# Altium PCB CH32F&Vx0xV-R1-1v1.PcbDoc (part 2 of 2)
Units mm, origin at the board's own origin, x right, y up, seen from the top; angles counter-clockwise.
Board outline 74 x 103.43 mm, 2 copper layers (Top Layer, Bottom Layer); 78 components, 138 nets, 482 pads, 658 vias.
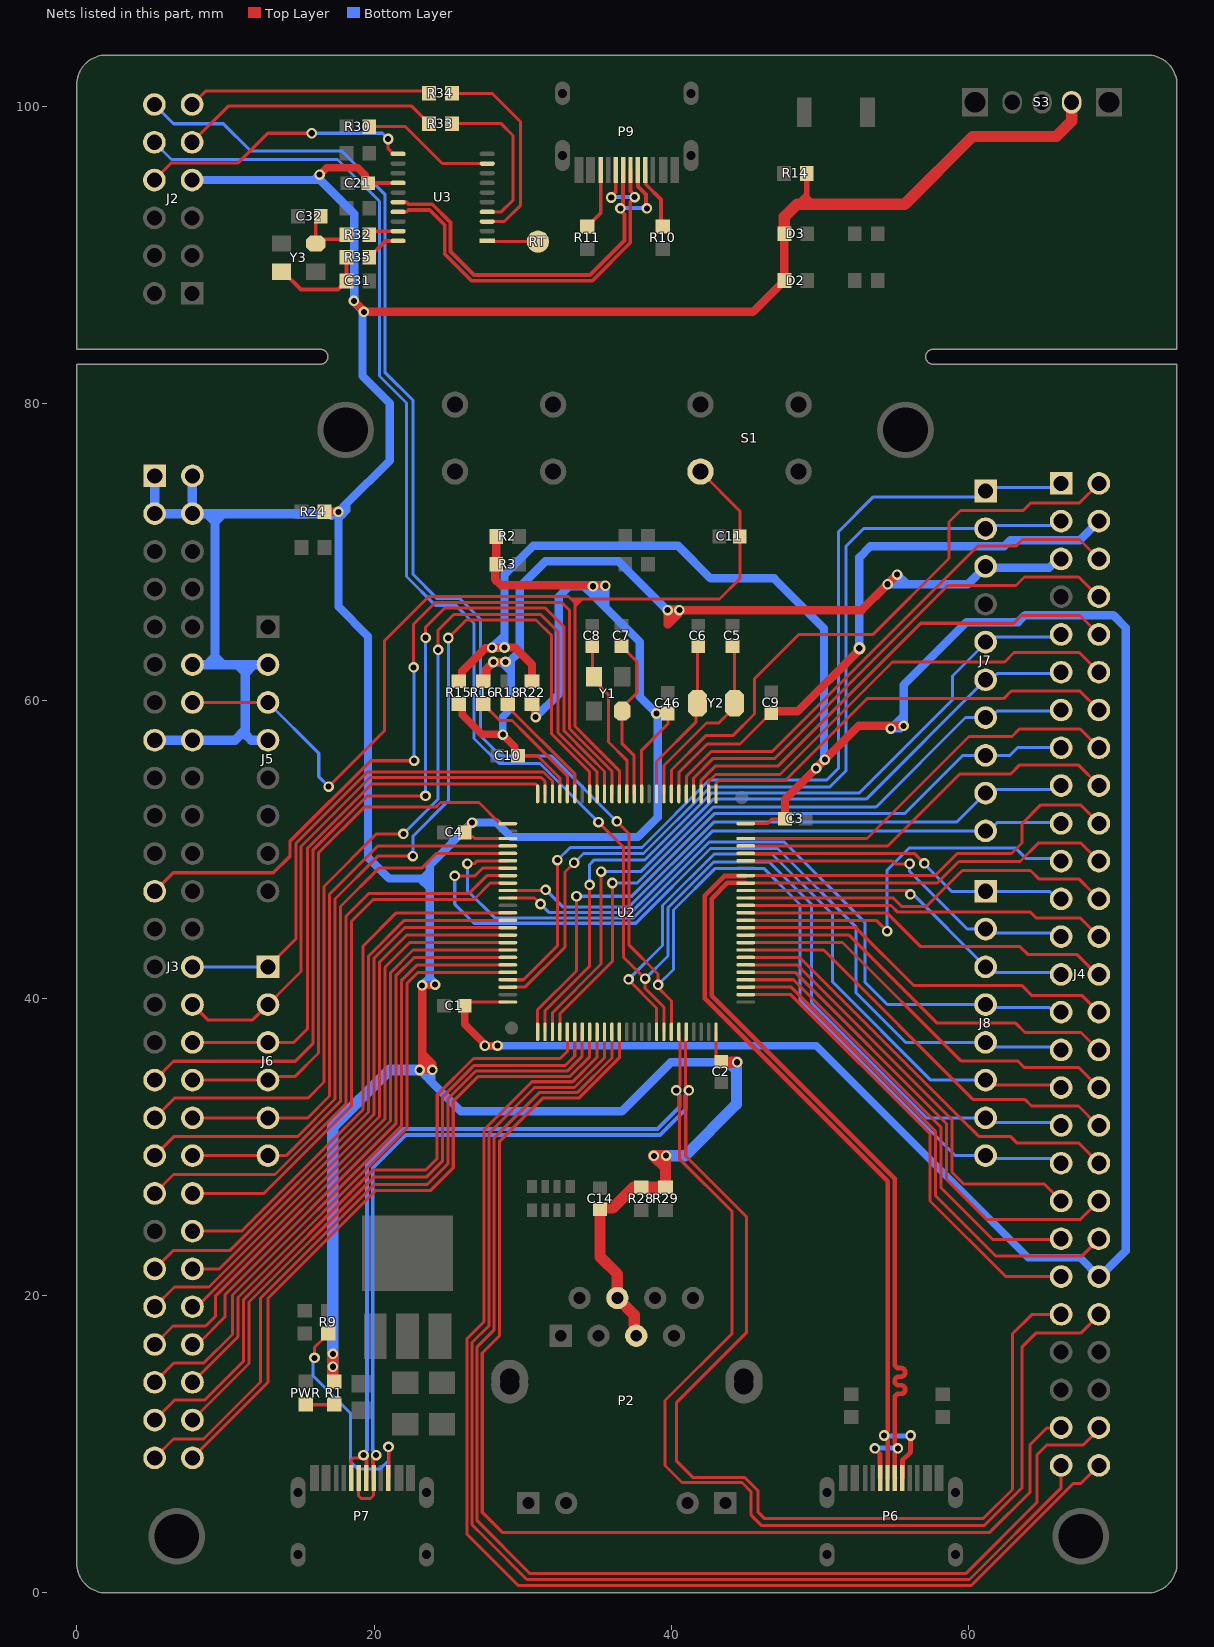
[diagram p2: the nets of this part, all layers, seen from the top]

## Via types
v1: diameter 0.61, hole 0.305, Top Layer to Bottom Layer, tented both sides, 509 vias
v2: diameter 0.711, hole 0.406, Top Layer to Bottom Layer, tented both sides, 148 vias
v3: diameter 0.813, hole 0.457, Top Layer to Bottom Layer, tented both sides, 1 vias

## Nets (pads, with @x,y where several pads share a name; then routed paths per layer and width w, separated by ;. In a path a pad name is that pad's centre, name@x,y a point inside that pad or via, vN(x,y) a via of type N, cw(c..) or ccw(c..) an arc to the next point about the centre after c; other vN are vias at no path point) (continued)
NetP7_B5: P7.B5 R9.2 | length 16.1
  Top Layer w0.203: v2(15.997,15.81) 15.997,16.519 16.53,17.052 16.53,17.077 16.893,17.44 R9.2@16.918,17.44 ; P7.B5@20.967,7.722 20.992,7.747 20.992,9.81 v2(20.975,9.827)
  Bottom Layer w0.203: v2(15.997,15.81) 15.911,15.723 15.911,14.586 18.42,12.077 18.42,8.831 18.904,8.346 20.427,8.346 20.975,8.894 v2(20.975,9.827)
NetP9_A5: P9.A5 R10.1 | length 4.2
  Top Layer w0.254: P9.A5@38.25,95.706 38.273,95.683 38.273,94.74 39.308,93.705 R10.1@39.308,91.902
NetP9_B5: P9.B5 R11.1 | length 4.2
  Top Layer w0.254: R11.1@34.337,91.902 35.25,92.814 P9.B5@35.25,95.706
NetPWR_1: PWR.1 R1.1 | length 1.6
  Top Layer w0.254: PWR.1@15.688,12.659 17.308,12.659 R1.1@17.325,12.675
NRST: C11.2 J3.14 J5.3 S1.1 U2.14 | length 74.1
  Top Layer w0.203: J3.14@7.79,59.888 J5.3@12.87,59.888 ; v2(16.951,54.231) 20.692,57.972 20.692,64.016 23.687,67.01 33.083,67.01 33.249,66.844 ; U2.14@36.5,53.74 36.5,55.291 34.75,57.042 33.51,58.281 33.51,66.343 ; S1.1@41.955,75.418 44.602,72.771 C11.2@44.602,71.051 ; C11.2@44.259,70.708 C11.2@44.602,71.051 ; 33.249,66.844 33.51,66.844 ; 33.249,66.844 33.51,66.583 ; 33.51,66.343 34.012,66.844 ; 33.51,66.343 33.51,66.583 ; 33.51,66.583 33.51,66.844 ; 33.51,66.583 33.771,66.844 ; 33.51,66.844 33.771,66.844 ; 33.771,66.844 34.012,66.844 ; 34.012,66.844 43.241,66.844 44.602,68.206 C11.2@44.602,71.051
  Bottom Layer w0.203: J5.3@12.87,59.888 16.282,56.476 16.282,54.9 v2(16.951,54.231)
OSC_IN: C32.2 R32.2 Y3.1 | length 4.3
  Top Layer w0.254: C32.2@16.417,92.58 16.083,92.247 Y3.1@16.083,90.753 16.384,90.753 16.675,91.044 17.858,91.044 R32.2@18.143,91.329
OSC_OUT: C31.2 R35.2 Y3.3 | length 6.7
  Top Layer w0.254: Y3.3@13.783,88.853 13.883,88.853 15.08,87.656 17.568,87.656 17.78,87.869 17.805,87.869 18.143,88.207 C31.2@18.143,88.232 R35.2@18.143,89.821
PA0: J3.28 J6.1 U2.23 | length 34.5
  Top Layer w0.203: J6.1@12.87,42.108 14.752,43.99 14.752,50.414 19.548,55.21 31.391,55.21 32,54.6 U2.23@32,53.74
  Bottom Layer w0.203: J3.28@7.79,42.108 J6.1@12.87,42.108
PA1: J3.30 J6.2 U2.24 | length 36.8
  Top Layer w0.203: J3.30@7.79,39.568 8.817,38.541 11.843,38.541 15.095,41.793 15.095,50.208 19.729,54.841 31.238,54.841 31.5,54.58 U2.24@31.5,53.74
PA2: J3.32 J6.3 U2.25 | length 38.1
  Top Layer w0.203: J3.32@7.79,37.028 J6.3@12.87,37.028 14.622,37.028 15.517,37.923 15.517,50.066 19.869,54.418 30.86,54.418 30.987,54.29 30.987,54.28 31,54.267 U2.25@31,53.74
PA3: J3.34 J6.4 U2.26 | length 37.7
  Top Layer w0.203: J3.34@7.79,34.488 J6.4@12.87,34.488 13.1,34.718 14.672,34.718 16.269,36.315 16.269,49.773 19.339,52.843 24.156,52.843 24.472,53.159 27.06,53.159 28.479,51.74 U2.26@29.255,51.74
PA4: J3.36 J6.5 U2.29 | length 37
  Top Layer w0.203: J3.36@7.79,31.948 J6.5@12.87,31.948 15.537,31.948 17.006,33.418 17.006,46.986 20.26,50.24 24.177,50.24 U2.29@29.255,50.24
PA5: J3.38 J6.6 U2.30 | length 37.6
  Top Layer w0.203: J3.38@7.79,29.408 J6.6@12.87,29.408 14.089,29.408 17.742,33.062 17.742,46.168 20.318,48.743 23.206,48.743 24.202,49.74 U2.30@29.255,49.74
PA6: J4.29 J8.4 U2.31 | length 54.5
  Top Layer w0.203: v2(26.273,49.047) 26.741,49.047 26.934,49.24 U2.31@29,49.24
  Bottom Layer w0.203: v2(26.273,49.047) 26.273,47.245 28.111,45.407 37.45,45.407 42.533,50.49 47.611,50.49 53.03,45.071 53.03,41.057 54.519,39.568 J8.4@61.13,39.568 61.331,39.368 65.431,39.368 65.485,39.313 65.957,39.313 J4.29@66.21,39.06
PA7: J4.31 J8.5 U2.32 | length 57.3
  Top Layer w0.203: v2(25.43,48.231) 26.787,48.231 27.296,48.74 U2.32@29,48.74
  Bottom Layer w0.203: v2(25.43,48.231) 25.43,46.326 26.717,45.039 37.603,45.039 42.627,50.064 47.142,50.064 52.427,44.779 52.427,40.348 55.747,37.028 61.487,37.028 61.802,36.714 66.016,36.714 J4.31@66.21,36.52
PA8: J4.33 J8.6 U2.67 | length 47.6
  Top Layer w0.203: v2(37.122,41.267) 37.122,41.215 39,39.337 U2.67@39,37.74 ; J8.6@61.13,34.488 61.487,34.488 61.813,34.163 66.027,34.163 J4.33@66.21,33.98
  Bottom Layer w0.203: v2(37.122,41.267) 37.122,41.27 39.4,43.547 39.4,46.228 42.873,49.701 46.769,49.701 50.828,45.643 50.828,41.104 57.444,34.488 J8.6@61.13,34.488
PA9: J2.10 J4.35 J8.7 U2.68 | length 127.3
  Top Layer w0.203: v2(35.097,51.837) 36.771,50.163 36.771,42.765 38.225,41.31 v2(38.235,41.31) 38.235,40.653 39.5,39.389 U2.68@39.5,37.74
  Bottom Layer w0.203: J2.10@5.225,97.561 6.381,96.405 17.55,96.405 20.365,93.59 20.365,81.843 22.181,80.027 22.181,68.355 24.119,66.417 25.504,66.417 26.725,65.196 26.725,57.47 28.417,55.778 31.156,55.778 v2(35.097,51.837) ; v2(38.235,41.31) 39.768,42.843 39.768,46.075 42.861,49.169 46.567,49.169 49.415,46.321 49.415,39.699 57.165,31.948 J8.7@61.13,31.948 61.487,31.948 61.81,31.626 66.024,31.626 J4.35@66.21,31.44
PA10: J2.12 J4.37 J8.8 U2.69 | length 129.8
  Top Layer w0.203: v2(36.33,51.889) 37.139,51.08 37.139,43.586 39.104,41.621 v2(39.104,40.897) ; v2@39.01,40.803 40,39.813 U2.69@40,37.74
  Bottom Layer w0.203: J2.12@5.225,100.101 6.518,98.808 9.869,98.808 11.691,96.986 17.812,96.986 20.731,94.067 20.731,82.089 22.631,80.188 22.631,68.491 24.252,66.87 25.776,66.87 27.158,65.487 27.158,57.658 28.543,56.273 31.945,56.273 v2(36.33,51.889) ; v2(39.104,40.897) 40.136,41.929 40.136,45.923 42.945,48.732 46.215,48.732 48.65,46.297 48.65,39.864 59.106,29.408 J8.8@61.13,29.408 61.487,29.408 61.687,29.209 65.544,29.209 65.853,28.9 J4.37@66.21,28.9
PA11: J4.46 P7.A7 P7.B7 U2.70 | length 123.4
  Top Layer w0.203: P7.B7@18.467,7.722 18.467,8.941 18.601,9.075 19.281,9.075 v2@19.31,9.104 ; v2@19.381,9.175 v2@19.31,9.104 ; v2@19.51,9.079 19.489,9.079 19.471,9.079 19.446,9.104 v2@19.31,9.104 ; v2(40.325,33.794) 40.325,33.895 40.566,34.136 40.566,37.153 40.5,37.219 U2.70@40.5,37.74 ; v2@40.417,33.711 40.417,33.571 40.535,33.453 40.535,29.202 44.091,25.646 44.091,17.453 39.573,12.936 39.573,8.567 40.715,7.426 44.741,7.426 45.345,6.822 45.345,5.263 46.08,4.529 47.638,4.529 61.027,4.529 63.563,7.065 63.563,16.53 64.501,17.468 67.521,17.468 68.75,18.697 J4.46@68.75,18.74
  Top Layer w0.254: v2(19.292,9.265) 19.304,9.265 19.489,9.079 v2@19.493,9.075 ; P7.A7@19.467,7.722 19.49,7.745 19.49,8.737 19.51,8.757 v2@19.51,9.079
  Bottom Layer w0.254: v2(19.292,9.265) 19.292,9.384 19.52,9.612 19.52,28.742 21.975,31.197 39.065,31.197 40.553,32.685 40.553,33.446 40.325,33.675 v2(40.325,33.794)
PA12: J4.45 P7.A6 P7.B6 U2.71 | length 121.7
  Top Layer w0.203: P7.A6@18.967,7.722 18.967,6.526 19.138,6.355 19.764,6.355 19.967,6.558 P7.B6@19.967,7.722 ; U2.71@41,37.74 41,37.219 40.934,37.153 40.934,34.136 ; v2@41.083,33.711 41.083,33.571 40.965,33.453 40.965,29.381 45.059,25.287 45.059,17.528 40.35,12.819 40.35,8.857 41.428,7.779 44.909,7.779 45.839,6.85 45.839,5.418 46.24,5.017 47.672,5.017 60.994,5.017 62.935,6.958 62.935,17.427 64.227,18.719 66.189,18.719 J4.45@66.21,18.74 ; v2(41.175,33.794) v2@41.175,33.844 ; 40.934,34.136 40.934,34.086 v2@41.175,33.844 ; 40.934,34.136 41.175,33.895 v2@41.175,33.844
  Top Layer w0.254: P7.B6@19.967,7.722 19.944,7.745 19.944,8.737 19.914,8.767 19.914,9.077 20.101,9.265 v2(20.142,9.265)
  Bottom Layer w0.254: v2(20.142,9.265) 20.142,9.384 19.914,9.612 19.914,28.579 22.138,30.803 39.228,30.803 40.947,32.521 40.947,33.446 41.175,33.675 v2@41.175,33.693
PA15: J4.43 U2.77 | length 31.5
  Top Layer w0.203: U2.77@45.255,40.24 48.03,40.24 57.395,30.875 57.395,26.366 62.48,21.28 J4.43@66.21,21.28
PB0: J4.17 J7.9 U2.35 | length 41.1
  Top Layer w0.203: U2.35@29,47.24 31.495,47.24 v2(31.546,47.29)
  Bottom Layer w0.203: v2(31.546,47.29) 32.692,46.144 37.145,46.144 42.84,51.839 59.177,51.839 61.377,54.039 65.591,54.039 65.853,54.3 J4.17@66.21,54.3
PB1: J4.19 J7.10 U2.36 | length 40.1
  Top Layer w0.203: U2.36@29,46.74 30.789,46.74 v2(31.194,46.335)
  Bottom Layer w0.203: v2(31.194,46.335) 31.753,45.776 37.298,45.776 42.774,51.252 J7.10@61.13,51.252 61.354,51.252 61.909,51.808 66.163,51.808 J4.19@66.21,51.76
PB3: J4.26 U2.89 | length 24.4
  Top Layer w0.203: U2.89@45.255,46.24 54.768,46.24 55.222,45.786 64.146,45.786 64.554,45.378 67.513,45.378 J4.26@68.75,44.14
PB4: J4.24 U2.90 | length 25.3
  Top Layer w0.203: U2.90@45.255,46.74 54.926,46.74 55.511,46.154 57.125,46.154 59.562,48.591 64.148,48.591 64.732,48.006 67.424,48.006 68.319,47.112 J4.24@68.673,47.112
PB5: J4.27 J8.3 U2.91 | length 23.2
  Top Layer w0.203: U2.91@45.255,47.24 55.795,47.24 56.053,46.982 v2(56.071,46.982)
  Bottom Layer w0.203: v2(56.071,46.982) 56.256,46.982 60.953,42.285 J8.3@60.953,42.108 ; J8.3@61.13,42.108 61.487,42.108 61.879,41.717 66.093,41.717 J4.27@66.21,41.6
PB6: J4.22 P6.A7 P6.B7 U2.92 | length 78
  Top Layer w0.203: U2.92@45,47.74 57.877,47.74 59.326,49.189 63.441,49.189 64.704,50.452 67.519,50.452 J4.22@68.75,49.22
  Top Layer w0.323: U2.92@45,47.759 43.77,47.759 42.708,46.697 42.708,40.172 55.014,27.865 55.014,16.521 55.014,15.409 ccw(c55.302,15.409) 55.302,15.121 55.437,15.121 cw(c55.437,14.832) 55.437,14.544 55.302,14.544 ccw(c55.302,14.256) 55.302,13.967 55.437,13.967 cw(c55.437,13.679) 55.437,13.391 55.302,13.391 ccw(c55.302,13.103) 55.014,13.103 55.014,12.365 55.014,10.045 55.233,9.825 v2(55.233,9.72) 55.233,9.673 55.014,9.454 55.014,8.466 55.022,8.458 55.022,7.733 P6.A7@55.033,7.722 ; v2@53.678,9.78 v2(53.678,9.72) 53.678,9.675 54.033,9.32 P6.B7@54.033,7.722
  Bottom Layer w0.323: v2@53.678,9.78 53.708,9.75 55.203,9.75 v2(55.233,9.72)
PB7: J4.20 P6.A6 P6.B6 U2.93 | length 79.7
  Top Layer w0.203: U2.93@45,48.24 57.726,48.24 59.219,49.732 62.877,49.732 63.576,50.432 63.576,51.731 64.846,53.001 67.509,53.001 J4.20@68.795,51.715
  Top Layer w0.323: U2.93@45,48.221 43.578,48.221 42.246,46.888 42.246,39.98 54.552,27.674 54.552,10.901 54.304,10.653 v2(54.304,10.588) 54.304,10.509 54.552,10.261 54.552,8.466 54.544,8.458 54.544,7.733 P6.A6@54.533,7.722 ; P6.B6@55.533,7.722 55.533,8.911 56.087,9.465 v2(56.087,10.588)
  Bottom Layer w0.323: v2@54.304,10.548 56.047,10.548 v2(56.087,10.588)
PB8: J4.25 J8.2 U2.95 | length 23.4
  Top Layer w0.203: U2.95@45.255,49.24 54.85,49.24 55.05,49.04 v2(56.021,49.04)
  Bottom Layer w0.203: v2(56.021,49.04) 56.021,48.518 59.891,44.648 61.487,44.648 61.765,44.371 65.98,44.371 J4.25@66.21,44.14
PB9: J4.23 J8.1 U2.96 | length 22.2
  Top Layer w0.203: U2.96@45.255,49.74 56.333,49.74 v2(57.009,49.064)
  Bottom Layer w0.203: v2(57.009,49.064) 57.245,48.828 57.245,48.786 58.842,47.188 J8.1@61.13,47.188 65.431,47.188 65.939,46.68 J4.23@66.21,46.68
PB10: J4.1 J7.1 U2.47 | length 63.7
  Top Layer w0.203: U2.47@29,41.24 30.053,41.24 32.336,43.523 v2(32.336,49.288)
  Bottom Layer w0.203: v2(32.336,49.288) 33.188,50.14 38.016,50.14 42.535,54.659 50.429,54.659 51.246,55.475 51.246,71.378 53.583,73.716 60.733,73.716 61.351,74.333 65.923,74.333 J4.1@66.21,74.62
PB11: J4.3 J7.2 U2.48 | length 62
  Top Layer w0.203: U2.48@29,40.74 30.146,40.74 32.839,43.433 32.839,48.485 v2(33.461,49.107)
  Bottom Layer w0.203: v2(33.461,49.107) 34.083,49.729 38.126,49.729 42.605,54.208 50.656,54.208 51.758,55.31 51.758,70.415 52.915,71.572 61.401,71.572 61.627,71.798 65.57,71.798 65.853,72.08 J4.3@66.21,72.08
PB12: J4.15 J7.8 U2.51 | length 47
  Top Layer w0.203: U2.51@31,37.74 31,39.215 33.617,41.832 v2(33.617,46.855)
  Bottom Layer w0.203: v2(33.617,46.855) 37.336,46.855 42.887,52.407 55.68,52.407 59.605,56.332 J7.8@61.13,56.332 62.775,56.332 63.311,56.868 66.182,56.868 J4.15@66.21,56.84
PB13: J4.9 J7.5 U2.52 | length 51.6
  Top Layer w0.203: U2.52@31.5,37.74 31.5,39.157 34.506,42.163 v2(34.506,47.617)
  Bottom Layer w0.203: v2(34.506,47.617) 34.506,48.995 34.814,49.303 38.221,49.303 42.724,53.806 51.051,53.806 52.651,53.806 58.91,60.066 58.91,61.666 61.13,63.886 J7.5@61.13,63.952 61.487,63.952 61.836,64.301 66.051,64.301 J4.9@66.21,64.46
PB14: J4.11 J7.6 U2.53 | length 48.6
  Top Layer w0.203: U2.53@32,37.74 32,39.027 35.268,42.294 v2(35.268,48.506)
  Bottom Layer w0.203: v2(35.268,48.506) 37.945,48.506 42.821,53.383 53.1,53.383 J7.6@61.13,61.412 61.481,61.412 61.909,61.841 66.131,61.841 J4.11@66.21,61.92
PB15: J4.13 J7.7 U2.54 | length 46.5
  Top Layer w0.203: U2.54@32.5,37.74 32.5,38.939 36.03,42.469 v2(36.03,47.744)
  Bottom Layer w0.203: v2(36.03,47.744) 37.704,47.744 42.817,52.858 53.769,52.858 59.784,58.872 61.471,58.872 61.909,59.311 66.141,59.311 J4.13@66.21,59.38
PC0: J3.23 U2.15 | length 55.7
  Top Layer w0.203: v2(22.668,62.25) 22.668,65.158 24.124,66.614 32.624,66.614 33.142,66.096 33.142,58.129 34.597,56.673 36,55.27 U2.15@36,53.74
  Top Layer w0.229: J3.23@5.25,47.188 6.494,48.433 13.229,48.433 14.349,49.553 14.349,50.547 19.777,55.974 v2(22.695,55.974)
  Bottom Layer w0.203: v2(22.668,62.25) 22.695,62.223 v2(22.695,55.974)
PC1: J3.33 U2.16 | length 67.8
  Top Layer w0.203: J3.33@5.25,34.488 6.52,35.758 14.703,35.758 15.885,36.94 15.885,49.949 19.539,53.603 v2(23.464,53.603) ; v2(23.474,64.24) 23.474,64.969 24.75,66.246 31.507,66.246 32.773,64.979 32.773,57.976 34.444,56.305 35.5,55.249 U2.16@35.5,53.74
  Bottom Layer w0.203: v2(23.464,53.603) 23.474,53.612 v2(23.474,64.24)
PC2: J3.35 U2.17 | length 68
  Top Layer w0.203: J3.35@5.25,31.948 6.593,33.291 15.569,33.291 16.637,34.36 16.637,47.514 20.174,51.051 v2(21.979,51.051) ; v2(24.307,63.428) 24.307,64.742 25.371,65.806 31.212,65.806 32.369,64.649 32.369,57.86 34.292,55.937 35,55.229 U2.17@35,53.74
  Bottom Layer w0.203: v2(21.979,51.051) 24.307,53.379 v2(24.307,63.428)
PC3: J3.37 U2.18 | length 68.8
  Top Layer w0.203: J3.37@5.25,29.408 6.531,30.69 14.85,30.69 17.374,33.214 17.374,46.663 20.259,49.548 v2(22.615,49.548) ; v2(24.993,64.223) 26.207,65.437 30.9,65.437 31.951,64.386 31.951,57.763 34.5,55.214 U2.18@34.5,53.74
  Bottom Layer w0.203: v2(22.615,49.548) 22.615,50.894 24.993,53.272 v2(24.993,64.223)
PC4: J3.39 U2.33 | length 40
  Top Layer w0.203: J3.39@5.25,26.868 6.52,28.138 13.34,28.138 18.111,32.909 18.111,45.509 19.656,47.055 26.401,47.055 27.586,48.24 U2.33@29,48.24
PC5: J3.40 U2.34 | length 37.1
  Top Layer w0.203: J3.40@7.79,26.868 12.591,26.868 18.479,32.757 18.479,45.167 19.946,46.634 26.717,46.634 27.822,47.74 U2.34@29,47.74
PC6_305: R30.2 U3.9 | length 9
  Top Layer w0.203: R30.2@19.683,98.608 22.117,98.608 24.596,96.129 U3.9@27.615,96.129
PC10: J4.42 U2.78 | length 34
  Top Layer w0.203: U2.78@45.255,40.74 48.066,40.74 57.763,31.043 57.763,26.716 61.803,22.676 67.632,22.676 68.75,23.794 J4.42@68.75,23.82
PC11: J4.41 U2.79 | length 30.6
  Top Layer w0.203: U2.79@45.255,41.24 48.218,41.24 58.131,31.327 58.131,27.243 61.596,23.778 66.168,23.778 J4.41@66.21,23.82
PC12: J4.40 U2.80 | length 33.1
  Top Layer w0.203: U2.80@45.255,41.74 48.324,41.74 58.499,31.564 58.499,27.813 61.198,25.114 67.504,25.114 J4.40@68.75,26.36
PC13: J4.2 U2.7 | length 41.2
  Top Layer w0.203: U2.7@40,53.74 40,55.34 42.316,57.655 44.131,57.655 45.584,59.108 45.584,61.484 48.551,64.45 53.543,64.45 58.666,69.573 58.666,72.019 59.444,72.797 63.662,72.797 64.182,73.317 67.447,73.317 J4.2@68.75,74.62
PC14: C5.1 U2.8 Y2.1 | length 12.4
  Top Layer w0.203: U2.8@39.5,53.74 39.5,55.651 42.357,58.508 43.189,58.508 44.249,59.569 Y2.1@44.249,59.832 44.249,63.625 C5.1@44.26,63.635
PC15: C6.1 U2.9 Y2.2 | length 11.1
  Top Layer w0.203: U2.9@39,53.74 39,55.914 41.646,58.561 41.646,58.815 41.646,59.729 Y2.2@41.749,59.832 41.749,63.491 C6.1@41.863,63.605
PD0: J4.39 U2.81 | length 29.6
  Top Layer w0.203: U2.81@45.255,42.24 48.451,42.24 58.868,31.823 58.868,28.295 59.649,27.513 65.057,27.513 J4.39@66.21,26.36
PD0_305: R32.1 U3.19 | length 2
  Top Layer w0.254: R32.1@19.683,91.329 19.934,91.58 U3.19@21.621,91.58
PD1: J4.38 U2.82 | length 29.2
  Top Layer w0.203: U2.82@45.255,42.74 48.64,42.74 59.244,32.136 60.675,30.705 62.793,30.705 63.253,30.245 67.406,30.245 J4.38@68.75,28.9
PD1_305: R35.1 U3.20 | length 2.4
  Top Layer w0.254: R35.1@19.683,89.821 19.683,89.846 20.767,90.93 U3.20@21.621,90.93
PD2: J4.36 U2.83 | length 28.4
  Top Layer w0.203: U2.83@45.255,43.24 50.242,43.24 60.303,33.178 63.793,33.178 64.221,32.749 67.371,32.749 68.68,31.44 J4.36@68.75,31.44
PD3: J4.34 U2.84 | length 27.5
  Top Layer w0.203: U2.84@45.255,43.74 51.507,43.74 59.463,35.784 63.276,35.784 63.73,35.331 67.399,35.331 J4.34@68.75,33.98
PD4: J4.32 U2.85 | length 26.7
  Top Layer w0.203: U2.85@45.255,44.24 51.953,44.24 57.872,38.32 63.153,38.32 63.776,37.697 67.54,37.697 68.717,36.52 J4.32@68.75,36.52
PD5: J4.30 U2.86 | length 25.8
  Top Layer w0.203: U2.86@45.255,44.74 52.406,44.74 56.308,40.838 63.586,40.838 64.252,40.171 67.639,40.171 J4.30@68.75,39.06
PD6: J4.21 U2.87 | length 26.1
  Top Layer w0.203: U2.87@45.255,45.24 53.774,45.24 v2(54.51,44.504)
  Bottom Layer w0.203: v2(54.51,44.504) 54.51,48.619 55.975,50.084 63.164,50.084 63.864,49.384 65.865,49.384 J4.21@65.998,49.516
PD7: J4.28 U2.88 | length 25.2
  Top Layer w0.203: U2.88@45.255,45.74 51.46,45.74 54.49,45.74 56.766,43.464 63.449,43.464 63.96,42.953 67.254,42.953 68.606,41.6 J4.28@68.75,41.6
PD8: J3.51 U2.55 | length 44.3
  Top Layer w0.203: J3.51@5.25,11.628 6.614,12.992 8.633,12.992 11.215,15.574 11.215,17.073 11.221,17.079 11.221,19.724 19.951,28.455 23.492,28.455 24.249,29.212 24.249,31.331 24.252,31.334 24.252,33.501 26.687,35.937 32.521,35.937 33,36.416 U2.55@33,37.74
PD9: J3.52 U2.56 | length 42.4
  Top Layer w0.203: J3.52@7.79,11.628 11.589,15.428 11.589,19.572 19.979,27.962 23.52,27.962 24.592,29.034 24.592,31.189 24.595,31.192 24.595,33.335 24.617,33.358 24.617,33.363 26.713,35.459 26.718,35.459 26.744,35.484 32.876,35.484 33.5,36.108 U2.56@33.5,37.74
PD10: J3.53 U2.57 | length 47.4
  Top Layer w0.203: J3.53@5.25,9.088 6.519,10.357 8.538,10.357 12.366,14.185 12.366,19.827 20.006,27.468 23.573,27.468 24.96,28.855 24.96,33.221 26.855,35.116 33.029,35.116 34,36.087 U2.57@34,37.74
PD11: J3.54 U2.58 | length 45.5
  Top Layer w0.203: J3.54@7.79,9.088 12.861,14.159 12.861,19.801 20.139,27.079 23.821,27.079 25.329,28.586 25.329,33.073 27.003,34.748 33.181,34.748 34.5,36.067 U2.58@34.5,37.74
PD12: J4.54 U2.59 | length 86.3
  Top Layer w0.203: U2.59@35,37.74 35,36.021 33.359,34.379 30.632,34.379 27.397,31.145 27.397,18.248 26.25,17.101 26.25,3.943 27.497,2.696 29.693,0.499 60.161,0.499 67.036,7.374 67.544,7.374 J4.54@68.75,8.58
PD13: J4.53 U2.60 | length 83.6
  Top Layer w0.203: U2.60@35.5,37.74 35.5,36 33.486,33.986 30.789,33.986 27.74,30.936 27.74,17.986 26.593,16.839 26.593,4.593 27.559,3.627 30.279,0.907 60.048,0.907 66.21,7.069 J4.53@66.21,8.58
PD14: J4.52 U2.61 | length 87.4
  Top Layer w0.203: U2.61@36,37.74 36,35.979 33.664,33.643 31.109,33.643 28.083,30.616 28.083,17.699 26.936,16.552 26.936,4.855 30.491,1.3 59.786,1.3 64.583,6.097 64.583,9.289 65.242,9.948 67.69,9.948 68.75,11.008 J4.52@68.75,11.12
PD15: J4.51 U2.62 | length 81.8
  Top Layer w0.203: U2.62@36.5,37.74 36.5,35.994 33.806,33.3 31.374,33.3 28.426,30.352 28.426,17.28 27.279,16.133 27.279,5.42 28.623,4.076 61.412,4.076 64.13,6.794 64.13,9.977 65.262,11.109 66.199,11.109 J4.51@66.21,11.12
PE0: J4.18 U2.97 | length 26.6
  Top Layer w0.203: U2.97@45,50.24 54.547,50.24 59.389,55.082 62.813,55.082 63.429,55.697 67.353,55.697 J4.18@68.75,54.3
PE1: J4.16 U2.98 | length 27.3
  Top Layer w0.203: U2.98@45,50.74 53.153,50.74 60.016,57.603 62.9,57.603 63.399,58.102 67.488,58.102 J4.16@68.75,56.84
PE2: J4.14 U2.1 | length 29.6
  Top Layer w0.203: U2.1@43,53.74 43,54.449 43.186,54.635 47.648,54.635 53.16,60.147 62.347,60.147 62.86,60.659 67.471,60.659 J4.14@68.75,59.38
PE3: J4.12 U2.2 | length 31.2
  Top Layer w0.203: U2.2@42.5,53.74 42.5,54.578 42.97,55.048 47.299,55.048 54.864,62.613 62.41,62.613 63.042,63.245 67.426,63.245 J4.12@68.75,61.92
PE4: J4.10 U2.3 | length 32.8
  Top Layer w0.203: U2.3@42,53.74 42,54.654 42.948,55.602 47.151,55.602 56.765,65.215 63.023,65.215 63.541,65.733 67.478,65.733 J4.10@68.75,64.46
PE5: J4.8 U2.4 | length 34.5
  Top Layer w0.203: U2.4@41.5,53.74 41.5,54.809 42.823,56.132 46.972,56.132 58.591,67.752 63.17,67.752 63.75,68.332 67.389,68.332 68.721,67 J4.8@68.75,67
PE6: J4.6 U2.5 | length 36.1
  Top Layer w0.203: U2.5@41,53.74 41,54.911 42.684,56.595 46.785,56.595 60.586,70.396 63.161,70.396 63.613,70.849 67.441,70.849 J4.6@68.75,69.54
PE7: J3.42 U2.38 | length 36.8
  Top Layer w0.203: J3.42@7.79,24.328 11.093,24.328 19.261,32.496 19.261,43.497 21.503,45.74 U2.38@29.255,45.74
PE8: J3.43 U2.39 | length 39.9
  Top Layer w0.203: J3.43@5.25,21.788 6.479,23.017 10.302,23.017 19.629,32.344 19.629,42.827 22.042,45.24 U2.39@29.255,45.24
PE9: J3.44 U2.40 | length 37.1
  Top Layer w0.203: J3.44@7.79,21.788 9.594,21.788 19.997,32.191 19.997,42.694 22.043,44.74 U2.40@29.255,44.74
PE10: J3.45 U2.41 | length 40.4
  Top Layer w0.203: J3.45@5.25,19.248 6.581,20.579 8.906,20.579 20.366,32.039 20.366,42.418 22.188,44.24 U2.41@29.255,44.24
PE11: J3.46 U2.42 | length 37.6
  Top Layer w0.203: J3.46@7.79,19.248 8.096,19.248 20.734,31.886 20.734,42.07 22.403,43.74 U2.42@29.255,43.74
PE12: J3.47 U2.43 | length 41.6
  Top Layer w0.203: J3.47@5.25,16.708 6.488,17.946 8.683,17.946 9.326,18.59 9.326,19.958 21.102,31.734 21.102,41.716 22.626,43.24 U2.43@29.255,43.24
PE13: J3.48 U2.44 | length 39
  Top Layer w0.203: J3.48@7.79,16.708 8.122,16.708 9.983,18.57 9.983,20.058 21.471,31.546 21.471,41.51 22.7,42.74 U2.44@29.255,42.74
PE14: J3.49 U2.45 | length 42.9
  Top Layer w0.203: J3.49@5.25,14.168 6.539,15.457 8.558,15.457 10.485,17.384 10.485,20.039 21.839,31.393 21.839,41.163 22.915,42.24 U2.45@29.255,42.24
PE15: J3.50 U2.46 | length 40.1
  Top Layer w0.203: J3.50@7.79,14.168 10.853,17.231 10.853,19.877 22.207,31.231 22.207,40.986 22.961,41.74 U2.46@29.255,41.74
RST0: J2.8 U3.11 | length 18.7
  Top Layer w0.203: J2.8@5.225,95.021 6.382,96.179 10.865,96.179 12.855,98.169 v2(15.813,98.169) ; v2(20.954,97.783) 20.954,97.118 21.293,96.78 U3.11@21.621,96.78
  Bottom Layer w0.203: v2(15.813,98.169) 20.569,98.169 v2(20.954,97.783)
RT: RT.1 U3.1 | length 3.4
  Top Layer w0.203: U3.1@27.615,90.93 27.666,90.879 RT.1@31.026,90.879
RX_OUT: J2.9 R33.1 | length 17.4
  Top Layer w0.203: J2.9@7.765,97.561 10.189,99.986 22.529,99.986 23.312,99.202 23.337,99.202 23.701,98.839 R33.1@23.701,98.814
TX_OUT: J2.11 R34.1 | length 16.4
  Top Layer w0.203: J2.11@7.765,100.101 8.665,101.001 23.555,101.001 R34.1@23.701,100.855
UART3_RX: R33.2 U3.4 | length 10.8
  Top Layer w0.203: R33.2@25.241,98.814 28.552,98.814 29.348,98.018 29.348,93.663 28.566,92.881 U3.4@27.615,92.881
UART3_TX: R34.2 U3.3 | length 13.7
  Top Layer w0.203: R34.2@25.241,100.855 27.936,100.855 29.865,98.926 29.865,93.335 28.761,92.231 U3.3@27.615,92.231
USB_N: P9.A7 P9.B7 U3.16 | length 28.8
  Top Layer w0.254: U3.16@21.621,93.531 21.631,93.521 22.194,93.521 22.319,93.397 23.916,93.397 25.151,92.162 25.151,90.211 26.722,88.64 34.521,88.64 36.843,90.962 36.843,92.712 36.563,92.992 v2(36.563,93.116) ; v2@36.563,93.221 36.75,93.407 P9.A7@36.75,95.706 ; P9.B7@37.75,95.706 37.75,94.587 38.288,94.049 v2@38.288,93.116
  Bottom Layer w0.254: v2@36.563,93.134 v2@38.334,93.134
  other v2: 38.353,93.116
USB_P: P9.A6 P9.B6 U3.17 | length 28.6
  Top Layer w0.254: U3.17@21.621,92.881 21.631,92.89 22.206,92.89 22.319,93.003 23.753,93.003 24.757,91.999 24.757,90.048 26.559,88.246 34.684,88.246 37.237,90.799 37.237,93.538 37.527,93.828 v2(37.527,93.878) 37.527,94.002 37.25,94.279 P9.A6@37.25,95.706 ; v2@35.903,93.845 35.903,93.876 36.25,94.223 P9.B6@36.25,95.706
  Bottom Layer w0.254: v2@35.903,93.82 35.961,93.878 v2(37.527,93.878)
  other v2: 35.954,93.845
VBAT: C9.2 J4.4 U2.6 | length 40.3
  Top Layer w0.203: U2.6@40.5,53.74 40.5,55.175 42.416,57.091 44.617,57.091 C9.2@46.704,59.179
  Top Layer w0.559: C9.2@46.704,59.179 46.847,59.322 46.867,59.301 48.222,59.301 48.506,59.301 v3@52.638,63.433
  Bottom Layer w0.559: v3@52.638,63.433 52.638,69.652 53.371,70.385 62.377,70.385 62.78,70.788 67.458,70.788 J4.4@68.75,72.08
  other v3: 52.638,63.535
VCC: C2.2 C4.2 C14.2 C21.1 C46.1 D2.1 D3.1 J2.7 J3.1 J3.2 J3.3 J3.4 J3.12 J3.15 J3.16 J5.2 J5.4 P2.4 P2.5 R1.2 R2.1 R3.1 R14.2 R22.2 R24.2 R28.1 R29.1 S3.3 U2.11 U2.28 U2.75 U3.14 | length 360.3
  Top Layer w0.203: C4.2@26.272,51.484 26.272,51.004 26.446,50.83 26.683,50.83 26.774,50.74 U2.28@29,50.74 ; U2.11@38,53.74 38,56.679 39.777,58.455 C46.1@39.777,59.146 ; U2.75@43,37.74 43,36.54 43.003,36.538 43.003,36.08 C2.2@43.346,35.737
  Top Layer w0.254: C21.1@19.612,94.793 19.648,94.829 U3.14@21.621,94.829
  Top Layer w0.381: 48.445,93.398 49.104,94.057 ; 49.104,93.405 49.104,93.866 ; R14.2@49.104,95.462 49.104,94.057 ; 49.571,93.398 49.104,93.866 ; 49.104,93.866 49.104,94.057
  Top Layer w0.508: v2(16.345,95.383) 16.809,95.848 18.914,95.848 19.408,95.354 19.408,94.996 C21.1@19.612,94.793 ; v2(39,59.147) v2@39,59.202
  Top Layer w0.559: R24.2@16.482,72.652 R24.2@16.535,72.705 ; R24.2@16.536,72.706 R24.2@16.535,72.705 ; v2(17.608,72.704) v2(17.608,72.704) R24.2@16.535,72.705 ; v2(18.642,86.901) 19.386,86.156 45.489,86.156 47.388,88.055 47.413,88.055 47.599,88.241 D2.1@47.599,88.266 D3.1@47.599,91.402 ; v2(23.066,35.171) 23.069,35.175 23.923,35.175 v2(23.927,35.179) ; v2(23.066,35.171) 23.329,35.436 ; v2(23.241,40.861) 23.241,36.269 ; v2@23.241,40.885 24.087,40.885 v2(24.11,40.908) ; C4.2@26.272,51.484 v2(26.599,51.811) ; R2.1@28.218,71.051 R3.1@28.218,69.193 28.144,69.119 28.144,68.169 28.536,67.778 v2@35.557,67.778 ; R22.2@30.625,59.776 30.81,59.59 30.835,59.59 30.835,58.935 v2(30.868,58.903) ; v2(39,59.147) C46.1@39.743,59.146 ; 49.097,93.398 49.104,93.405 ; 23.241,36.269 23.927,35.583 v2(23.927,35.179) ; 23.241,36.269 23.241,35.524 23.329,35.436 ; 23.329,35.436 23.586,35.179 v2(23.927,35.179)
  Top Layer w0.762: v2(17.228,16.073) 17.216,16.061 17.216,14.299 17.3,14.215 R1.2@17.325,14.215 ; P2.5@37.635,17.295 37.494,17.436 37.494,18.706 P2.4@36.365,19.835 36.365,21.443 35.199,22.609 C14.2@35.199,25.813 35.275,25.889 36.057,25.889 37.449,27.281 R28.1@37.973,27.281 R29.1@39.605,27.281 39.605,28.605 ; v2(39.646,29.409) v2@39.631,29.394 ; C2.2@43.346,35.737 43.392,35.69 v2(44.417,35.69) ; D3.1@47.599,91.402 47.599,92.552 48.445,93.398 49.097,93.398 49.571,93.398 55.692,93.398 60.244,97.95 65.88,97.95 66.92,98.99 S3.3@66.92,100.252 ; 39.605,28.605 v2(38.817,29.394) v2@39.631,29.394 ; 39.605,28.605 39.605,29.367 v2@39.631,29.394
  Bottom Layer w0.508: 15.922,95.021 15.928,95.021 16.29,95.383 v2(16.345,95.383)
  Bottom Layer w0.559: J2.7@7.765,95.021 15.922,95.021 ; 15.928,95.021 16.383,95.021 18.671,92.734 v2@18.671,86.83 ; 16.976,72.588 17.137,72.427 ; v2(17.608,72.704) 18.131,73.227 ; v2@17.705,72.375 17.608,72.278 17.608,66.327 19.6,64.336 19.6,49.467 21.02,48.047 23.11,48.047 ; v2@17.807,72.477 18.131,72.801 18.131,73.227 ; v2@18.671,86.806 v2(19.321,86.156) ; v2@19.223,86.156 19.223,81.841 21.059,80.005 21.059,76.155 18.131,73.227 ; v2(23.066,35.171) 23.452,34.785 ; v2(23.927,35.179) v2@23.846,35.179 ; v2(24.11,40.908) v2@24.087,40.885 ; v2(30.868,58.903) 32.431,60.466 32.431,67.009 33.126,67.703 34.133,67.703 ; v2@38.896,59.106 39.073,58.929 39.073,52.15 37.756,50.834 29.211,50.834 28.234,51.811 v2(26.599,51.811) 23.749,48.96 23.749,48.504 ; v2(39,59.147) 37.877,60.269 37.877,63.959 35.557,66.279 ; 44.417,34.99 44.382,35.024 43.716,35.69 ; v2(44.417,35.69) 43.716,35.69 ; 23.11,48.047 23.292,48.047 ; 23.11,48.047 23.749,47.408 ; 23.292,48.047 23.749,48.047 ; 23.292,48.047 23.749,48.504 ; 23.452,34.785 23.846,34.391 ; 23.452,34.785 23.838,35.171 v2@23.846,35.179 ; 23.749,40.885 23.749,41.311 ; 23.749,40.885 v2@24.087,40.885 ; 23.749,40.885 23.264,40.885 v2(23.241,40.861) 23.241,40.874 23.749,41.382 ; 23.749,41.311 24.087,40.973 v2@24.087,40.885 ; 23.749,41.311 23.749,41.382 ; 23.749,41.382 23.749,47.408 ; 23.749,47.408 23.749,48.047 ; 23.749,48.047 23.749,48.504 ; 23.846,34.391 v2@23.846,35.179 ; 23.846,34.391 25.845,32.392 36.66,32.392 39.958,35.69 43.716,35.69 ; 34.133,67.703 34.728,67.108 ; 34.133,67.703 v2(34.728,67.703) ; 34.728,67.108 35.048,66.788 ; 34.728,67.108 v2(34.728,67.703) ; v2(34.728,67.703) 34.744,67.72 35.142,67.72 ; 35.048,66.788 35.142,66.883 35.142,67.72 ; 35.048,66.788 35.557,66.279 ; 35.142,67.72 35.541,67.72 v2(35.557,67.736) 35.557,66.279
  Bottom Layer w0.635: J3.15@5.25,57.348 J3.16@7.79,57.348 10.652,57.348 11.329,58.026 ; J3.1@5.25,75.128 J3.3@5.25,72.588 J3.4@7.79,72.588 ; J3.12@7.79,62.428 8.778,62.428 ; J3.2@7.79,75.128 J3.4@7.79,72.588 ; J5.4@12.87,57.348 11.745,57.348 11.329,57.764 11.329,58.026 ; J5.2@12.87,62.428 11.912,62.428 ; v2(17.608,72.704) 17.587,72.704 17.471,72.588 16.976,72.588 9.839,72.588 ; J3.4@7.79,72.588 8.764,72.588 ; 8.764,72.588 9.839,72.588 ; 8.764,72.588 9.306,72.046 ; 8.778,62.428 9.306,62.428 ; 8.778,62.428 9.306,62.956 ; 9.306,62.428 9.834,62.428 ; 9.306,62.428 9.306,62.956 ; 9.306,62.956 9.306,72.046 ; 9.306,62.956 9.834,62.428 ; 9.306,72.046 9.306,72.056 9.839,72.588 ; 9.834,62.428 10.822,62.428 ; 10.822,62.428 11.912,62.428 ; 10.822,62.428 11.329,61.921 11.329,61.846 ; 11.329,58.026 11.329,61.846 ; 11.329,61.846 11.912,62.428
  Bottom Layer w0.762: v2(17.228,15.212) v2(17.228,16.073) 17.228,31.353 21.046,35.171 v2(23.066,35.171) v2@23.838,35.171 ; v2(38.817,29.394) 40.904,29.394 44.382,32.872 44.382,35.024 44.382,35.656 v2(44.417,35.69)
VDDA: C10.2 J4.5 J7.3 R15.2 R16.1 U2.22 | length 72.4
  Top Layer w0.203: C10.2@29.682,56.316 30.985,56.316 32.5,54.801 U2.22@32.5,53.74
  Top Layer w0.508: R15.2@25.708,59.776 25.733,59.776 25.944,59.565 25.944,59.051 27.237,57.758 28.622,57.758 29.479,56.901 29.479,56.519 C10.2@29.682,56.316
  Top Layer w0.559: R16.1@27.347,61.316 27.365,61.316 27.55,61.501 27.55,62.135 v2(28.025,62.609) 28.027,62.612 28.84,62.612 v2(28.843,62.615) ; v2@40.513,65.876 40.267,65.631 ; v2(55.187,68.485) v2(54.54,67.837) 52.794,66.092 v2(40.542,66.092) v2@39.784,66.092 ; v2@39.784,66.092 40.245,65.631 40.267,65.631 ; v2@39.784,66.092 v2(39.743,66.092) 39.743,65.131 39.768,65.131 40.267,65.631
  Bottom Layer w0.508: v2@28.558,62.597 29.233,61.922 ; v2(28.66,57.719) 28.66,58.929 29.233,59.501 29.233,61.922 ; 29.233,62.713 29.233,61.922
  Bottom Layer w0.559: v2(28.025,62.609) 28.037,62.597 28.558,62.597 29.078,62.597 29.801,63.32 29.801,67.667 31.515,69.381 36.453,69.381 v2@39.714,66.121 ; v2(39.743,66.092) v2@39.714,66.121 ; v2(40.542,66.092) 40.513,66.121 v2@39.714,66.121 ; v2(54.54,67.837) 55.187,67.837 ; v2(54.54,67.837) v2(55.187,68.485) ; J4.5@66.21,69.54 66,69.54 65.4,68.94 61.222,68.94 J7.3@61.13,69.032 59.935,67.837 55.834,67.837 ; 55.187,67.837 55.834,67.837 ; 55.187,67.837 v2(55.187,68.485) ; v2(55.187,68.485) 55.834,67.837
VIO: C1.2 C3.1 J4.44 R15.1 R22.1 U2.50 U2.100 | length 184.4
  Top Layer w0.203: C1.2@26.103,39.486 26.356,39.74 U2.50@29,39.74 ; U2.100@45,51.74 46.446,51.74 46.766,52.059 C3.1@47.642,52.059
  Top Layer w0.508: C1.2@26.103,39.486 26.103,38.252 v2@27.46,36.894 ; v2(27.46,36.8) v2@27.46,36.894 ; v2(28.305,36.808) 27.546,36.808 v2@27.46,36.894
  Top Layer w0.559: R15.1@25.708,61.316 25.733,61.316 25.918,61.501 25.918,61.979 27.483,63.544 27.916,63.544 v2(27.945,63.573) 27.954,63.582 v2(28.776,63.582) 29.483,63.582 30.625,62.44 R22.1@30.625,61.316 ; C3.1@47.642,52.059 47.642,53.363 v2(50.317,56.037) 52.598,58.319 v2(55.617,58.319) ; v2@54.662,58.125 v2(54.76,58.125)
  Bottom Layer w0.508: v2(27.46,36.8) 49.732,36.8 63.994,22.539 67.491,22.539 J4.44@68.75,21.28
  Bottom Layer w0.559: v2(27.945,63.573) v2@27.949,63.577 ; v2@49.712,55.47 50.266,56.024 50.266,64.876 46.907,68.235 42.642,68.235 40.461,70.417 30.692,70.417 28.776,68.501 28.776,64.404 ; v2(54.76,58.125) v2@54.789,58.154 ; J4.44@68.75,21.28 68.833,21.28 70.554,23.001 70.554,64.922 69.715,65.761 63.789,65.761 63.317,65.289 59.849,65.289 55.617,61.057 55.617,58.981 ; v2@27.949,63.577 28.776,64.404 ; v2@27.949,63.577 28.771,63.577 v2(28.776,63.582) 28.776,64.404 ; v2@54.789,58.154 55.617,58.981 ; v2@54.789,58.154 55.411,58.154 55.575,58.319 v2(55.617,58.319) 55.617,58.981
  other v2: 49.737,55.454
VREF+: R16.2 U2.21 | length 8.9
  Top Layer w0.203: R16.2@27.347,59.776 28.447,58.676 29.278,58.676 30.265,57.689 33,54.954 U2.21@33,53.74
VREF-: R18.2 U2.20 | length 7.9
  Top Layer w0.203: R18.2@28.898,59.688 33.5,55.086 U2.20@33.5,53.74
XI: C7.2 U2.12 Y1.1 | length 11
  Top Layer w0.203: Y1.1@36.576,59.423 37.689,60.536 37.689,62.618 C7.2@36.644,63.662 ; Y1.1@36.69,59.31 36.69,57.111 37.5,56.301 U2.12@37.5,53.74
XO: C8.2 U2.13 Y1.3 | length 10.9
  Top Layer w0.203: C8.2@34.688,63.662 34.688,61.635 34.663,61.61 34.663,61.51 35.77,60.403 35.77,57.235 37,56.005 U2.13@37,53.74
pads on no net: P2. P2.7 P6.A8 P6.B8 P7.A8 P7.B8 P9.A8 P9.B8 S1.2 S1.4 S2.2 S2.4 S3.0 S3.2 U1. U2.0 U3.2 U3.5 U3.7 U3.8

## Polygon pours and split planes (outlines as drawn)
GND on Bottom Layer "GND" (hatched Horizontal grid 0.203 track 0.203, remove dead copper, pour order 0): -0.092,103.421 -0.092,-0.197 73.991,-0.197 73.991,103.713
GND on Top Layer "GND" (hatched Horizontal grid 0.203 track 0.203, remove dead copper, pour order 1): -0.019,103.429 73.854,103.429 73.854,-0.538 -0.189,-0.538

## Keep-outs
Keep-Out Layer:
  lines w0.152: 22.4,82.638 ccw(c22.4,82.638) 22.4,82.638
  lines w0.254: 0,83.638 0,101.429 cw(c2,101.429) 2,103.429 72,103.429 ; 0,83.638 0,83.638 ; 0,83.638 16.4,83.638 cw(c16.4,83.138) 16.4,82.638 0,82.638 0,2 ccw(c2,2) 2,0 72,0 ccw(c72,2) 74,2 74,82.638 ; 22.4,83.638 ccw(c22.4,83.138) 22.4,82.638 51.602,82.638 ccw(c51.602,83.138) 51.602,83.638 22.4,83.638 ; 22.4,83.638 22.4,83.638 ; 57.6,83.638 ccw(c57.6,83.138) 57.6,82.638 74,82.638 ; 57.6,83.638 ccw(c57.6,83.638) 57.6,83.638 ; 57.6,83.638 74,83.638 74,101.429 ccw(c72,101.429) 72,103.429 ; 72,103.429 72,103.429 ; 74,82.638 ccw(c74,82.638) 74,82.638

## Silkscreen, mask and mechanical layers (free items; w line width, h text height)
Top Overlay:
  lines w0.152: 16.727,101.132 17.063,101.132 17.063,98.923 17.378,98.608 ; 20.448,91.329 21.366,91.329 21.366,89.537
  lines w0.254: 9.543,29.408 11.043,29.408 ; 9.543,31.948 11.043,31.948 ; 9.543,34.488 11.043,34.488 ; 9.543,37.028 11.043,37.028 ; 9.543,39.568 11.043,39.568 ; 9.543,42.108 11.043,42.108 ; 9.543,47.188 11.043,47.188 ; 9.543,49.728 11.043,49.728 ; 9.543,52.268 11.043,52.268 ; 9.543,54.808 11.043,54.808 ; 9.543,57.348 11.043,57.348 ; 9.543,59.888 11.043,59.888 ; 9.543,62.428 11.043,62.428 ; 9.543,64.968 11.043,64.968 ; 62.883,29.408 64.375,29.259 ; 62.883,31.948 64.375,31.799 ; 62.883,34.488 64.375,34.339 ; 62.883,37.028 64.375,36.879 ; 62.883,39.568 64.375,39.419 ; 62.883,42.108 64.375,41.959 ; 62.883,44.648 64.375,44.499 ; 62.883,47.188 64.375,47.039 ; 62.883,51.252 64.375,51.402 ; 62.883,53.792 64.375,53.942 ; 62.883,56.332 64.375,56.482 ; 62.883,58.872 64.375,59.022 ; 62.883,61.412 64.375,61.562 ; 62.883,63.952 64.375,64.102 ; 62.883,66.492 64.375,66.642 ; 62.883,69.032 64.375,69.182 ; 62.883,71.572 64.375,71.722 ; 62.883,74.112 64.375,74.262
  text "RX1" at 1.503,99.527 h0.89 r0.18
  text "TX_O" at 9.295,99.228 h0.89 r0.18
  text "IAP" at 54.514,98.94 h0.89
  text "TX1" at 1.596,96.957 h0.89 r0.18
  text "RX_O" at 9.295,96.718 h0.89 r0.18
  text "OFF" at 62.311,96.319 h0.89 r0.18
  text "ON" at 65.881,96.319 h0.89 r0.18
  text "RST0" at 0.424,94.388 h0.89 r0.18
  text "3V3" at 9.294,94.389 h0.89 r0.18
  text "GND" at 1.029,91.818 h0.89 r0.18
  text "GND" at 9.294,91.818 h0.89 r0.18
  text "PWR" at 42.829,90.694 h0.89 r0.18
  text "DIO" at 1.643,89.248 h0.89 r0.18
  text "DIO0" at 9.294,89.188 h0.89 r0.18
  text "CON" at 42.737,87.616 h0.89 r0.18
  text "CLK" at 1.215,86.678 h0.89 r0.18
  text "CLK0" at 9.294,86.678 h0.89 r0.18
  text "CH32F&Vx0xV-R1-1v1" at 57.209,80.795 h1.02 r0.18
  text "3V3" at 0.674,74.509 h0.89 r0.18
  text "3V3" at 9.497,74.509 h0.89 r0.18
  text "PC13" at 70.394,74.113 h0.89 r0.18
  text "PB10" at 56.093,73.504 h0.89 r0.18
  text "3V3" at 9.497,72.043 h0.89 r0.18
  text "3V3" at 0.674,71.968 h0.89 r0.18
  text "VBAT" at 70.325,71.571 h0.89 r0.18
  text "PB11" at 56.474,70.959 h0.89 r0.18
  text "BOOT0" at 9.354,69.508 h0.84 r0.18
  text "BOOT1" at 0.193,69.427 h0.84 r0.18
  text "PE6" at 70.835,69.029 h0.89 r0.18
  text "VDDA" at 55.869,68.414 h0.89 r0.18
  text "GND" at 0.695,66.886 h0.89 r0.18
  text "GND" at 9.375,66.907 h0.84 r0.18
  text "PE5" at 70.813,66.487 h0.89 r0.18
  text "GND" at 56.652,65.868 h0.89 r0.18
  text "GND" at 0.695,64.345 h0.89 r0.18
  text "PE4" at 70.792,63.945 h0.89 r0.18
  text "PB13" at 56.093,63.323 h0.89 r0.18
  text "3V3" at 14.727,61.902 h0.89 r0.18
  text "ELED1" at 0.413,61.804 h0.84 r0.18
  text "PE3" at 70.813,61.403 h0.89 r0.18
  text "PB14" at 56.051,60.778 h0.89 r0.18
  text "NRST" at 14.727,59.337 h0.89 r0.18
  text "ELED2" at 0.233,59.263 h0.84 r0.18
  text "PE2" at 70.813,58.861 h0.89 r0.18
  text "PB15" at 56.093,58.232 h0.89 r0.18
  text "3V3" at 14.727,56.772 h0.89 r0.18
  text "3V3" at 0.674,56.722 h0.89 r0.18
  text "PE1" at 71.004,56.319 h0.89 r0.18
  text "PB12" at 56.093,55.687 h0.89 r0.18
  text "+5V" at 14.727,54.208 h0.89 r0.18
  text "+5V" at 0.583,54.181 h0.89 r0.18
  text "PE0" at 70.813,53.777 h0.89 r0.18
  text "PB0" at 56.745,53.142 h0.89 r0.18
  text "LED1" at 0.676,51.64 h0.89 r0.18
  text "GND" at 14.727,51.643 h0.89 r0.18
  text "PB7" at 70.767,51.235 h0.89 r0.18
  text "PB1" at 57.126,50.596 h0.89 r0.18
  text "LED2" at 0.485,49.099 h0.89 r0.18
  text "GND" at 14.727,49.078 h0.89 r0.18
  text "PB6" at 70.788,48.693 h0.89 r0.18
  text "PD6" at 62.36,48.578 h0.89 r0.18
  text "PB9" at 56.787,46.593 h0.89 r0.18
  text "PC0" at 0.695,46.558 h0.89 r0.18
  text "+5V" at 14.727,46.513 h0.89 r0.18
  text "PB4" at 70.746,46.151 h0.89 r0.18
  text "GND" at 9.375,44.086 h0.89 r0.18
  text "PB8" at 56.745,44.033 h0.89 r0.18
  text "GND" at 0.695,44.017 h0.89 r0.18
  text "PB3" at 70.767,43.609 h0.89 r0.18
  text "PA0" at 14.73,41.504 h0.89 r0.18
  text "PA14" at 0.348,41.476 h0.89 r0.18
  text "PB5" at 56.745,41.473 h0.89 r0.18
  text "PD7" at 70.767,41.067 h0.89 r0.18
  text "PA1" at 14.73,38.971 h0.89 r0.18
  text "PA13" at 0.369,38.935 h0.89 r0.18
  text "PA6" at 56.694,38.913 h0.89 r0.18
  text "PD5" at 70.767,38.525 h0.89 r0.18
  text "PA2" at 14.73,36.438 h0.89 r0.18
  text "KEY" at 0.746,36.394 h0.89 r0.18
  text "PA7" at 56.652,36.354 h0.89 r0.18
  text "PD4" at 70.746,35.983 h0.89 r0.18
  text "PA3" at 14.73,33.905 h0.89 r0.18
  text "PC1" at 0.885,33.852 h0.89 r0.18
  text "PA8" at 56.652,33.794 h0.89 r0.18
  text "PD3" at 70.767,33.441 h0.89 r0.18
  text "PA4" at 14.73,31.372 h0.89 r0.18
  text "PC2" at 0.695,31.311 h0.89 r0.18
  text "PA9" at 56.694,31.234 h0.89 r0.18
  text "PD2" at 70.767,30.899 h0.89 r0.18
  text "PA5" at 14.73,28.839 h0.89 r0.18
  text "PC3" at 0.695,28.77 h0.89 r0.18
  text "PA10" at 56,28.674 h0.89 r0.18
  text "PD1" at 70.957,28.357 h0.89 r0.18
  text "PC4" at 0.674,26.229 h0.89 r0.18
  text "PC5" at 9.531,26.149 h0.89 r0.18
  text "PD0" at 61.522,25.817 h0.89 r0.18
  text "PC12" at 70.394,25.815 h0.89 r0.18
  text "PB2" at 0.741,23.688 h0.89 r0.18
  text "PE7" at 9.531,23.62 h0.89 r0.18
  text "PC11" at 61.34,23.275 h0.89 r0.18
  text "PC10" at 70.394,23.273 h0.89 r0.18
  text "PE8" at 0.788,21.147 h0.89 r0.18
  text "PE9" at 9.531,21.09 h0.89 r0.18
  text "PA15" at 61.15,20.733 h0.89 r0.18
  text "VIO" at 71.027,20.731 h0.89 r0.18
  text "PE10" at 0.462,18.606 h0.89 r0.18
  text "PE11" at 9.531,18.56 h0.89 r0.18
  text "PA12" at 61.15,18.191 h0.89 r0.18
  text "PA11" at 70.585,18.189 h0.89 r0.18
  text "PE12" at 0.462,16.065 h0.89 r0.18
  text "PE13" at 9.531,16.031 h0.89 r0.18
  text "PC9" at 61.497,15.648 h0.89 r0.18
  text "PC8" at 70.72,15.647 h0.89 r0.18
  text "PE14" at 0.441,13.524 h0.89 r0.18
  text "PE15" at 9.531,13.501 h0.89 r0.18
  text "PC7" at 61.476,13.106 h0.89 r0.18
  text "PC6" at 70.741,13.105 h0.89 r0.18
  text "PD8" at 0.741,10.983 h0.89 r0.18
  text "PD9" at 9.531,10.972 h0.89 r0.18
  text "PD15" at 61.196,10.564 h0.89 r0.18
  text "PD14" at 70.42,10.563 h0.89 r0.18
  text "PD10" at 0.416,8.442 h0.89 r0.18
  text "PD11" at 9.531,8.442 h0.89 r0.18
  text "PD13" at 61.196,8.021 h0.89 r0.18
  text "PD12" at 70.441,8.021 h0.89 r0.18
Bottom Overlay:
  drawing of 8876 lines, arcs and shapes, not listed
  text "https://wch.cn" at 43.75,61.594 h2.5
Top Solder:
  drawing of 3656 lines, arcs and shapes, not listed
  text "https://wch.cn" at 58.438,84.792 h2.5
Mechanical 1:
  lines w0.254: 51.6,82.636 ccw(c51.6,83.138) 51.6,83.641 ; 51.65,82.638 22.4,82.638 cw(c22.4,83.138) 22.4,83.638 51.65,83.638 ; 74,83.638 74,101.429 ccw(c72,101.429) 72,103.429 2,103.429 ccw(c2,101.429) 0,101.429 0,83.638 16.4,83.638 cw(c16.4,83.138) 16.4,82.638 0,82.638 0,2 ccw(c2,2) 2,0 72,0 ccw(c72,2) 74,2 74,82.638 57.6,82.638 cw(c57.6,83.138) 57.6,83.638 74,83.638 ; 74,83.638 74,83.638

## Text inside footprints (layer, text, board x,y; h text height)
D2: Top Overlay "+" at 46.632,87.987 h1.02 r90
D3: Top Overlay "+" at 46.632,91.123 h1.02 r90
LED1: Top Overlay "+" at 35.924,70.772 h1.02 r90
LED2: Top Overlay "+" at 35.924,68.914 h1.02 r90
PWR: Top Overlay "+" at 15.7,11.708 h1.02 r180